# Altium PCB 客厅白色灯带控制器.PcbDoc
Units mil, origin at the board's own origin, x right, y up, seen from the top; angles counter-clockwise.
Board outline 994.28 x 2332.86 mil, 2 copper layers (Top Layer, Bottom Layer); 22 components, 14 nets, 59 pads, 33 vias.
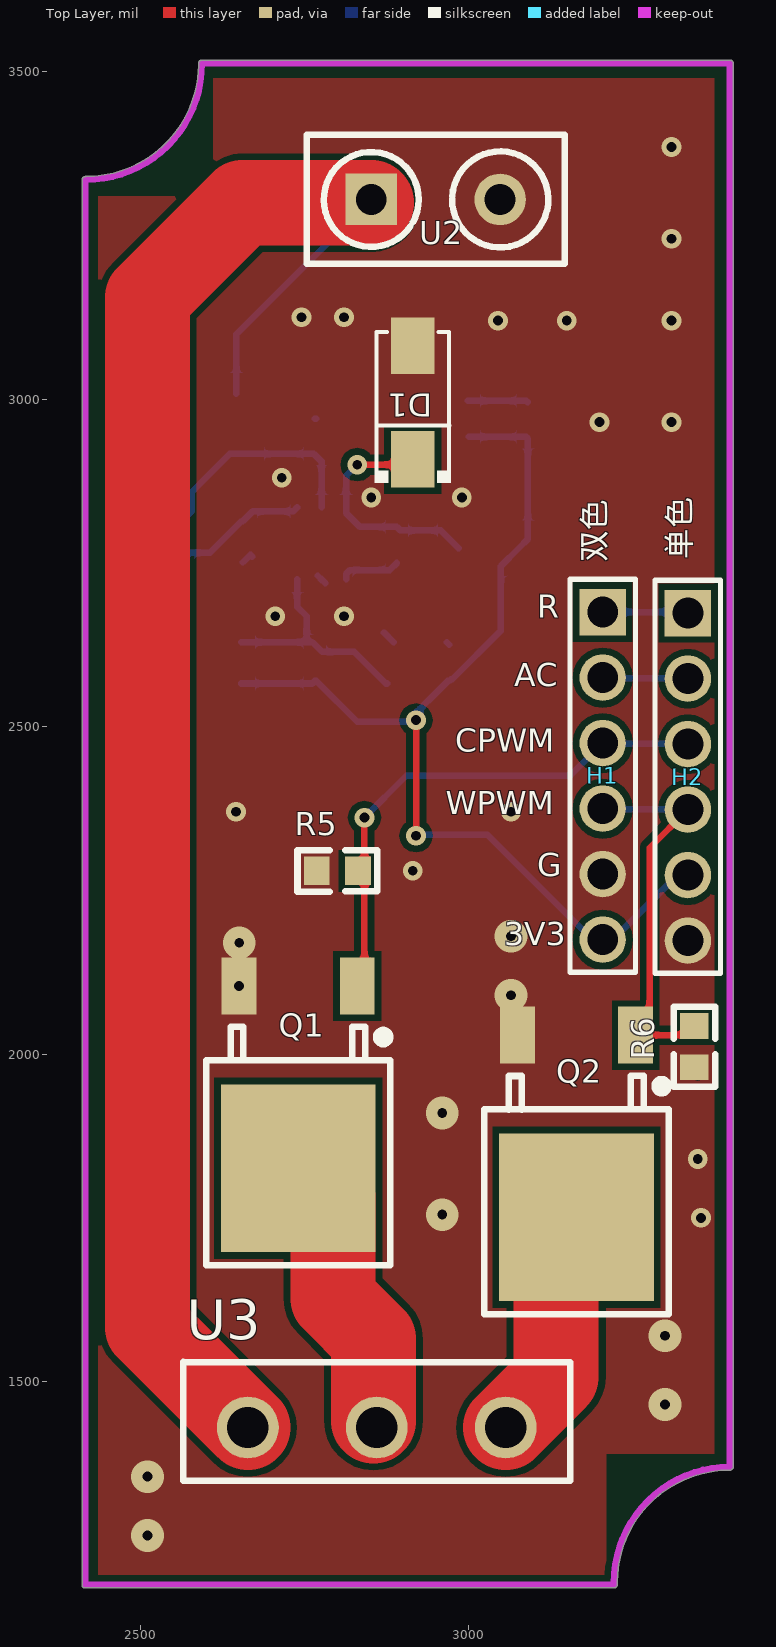
[diagram p0: Top Layer view]
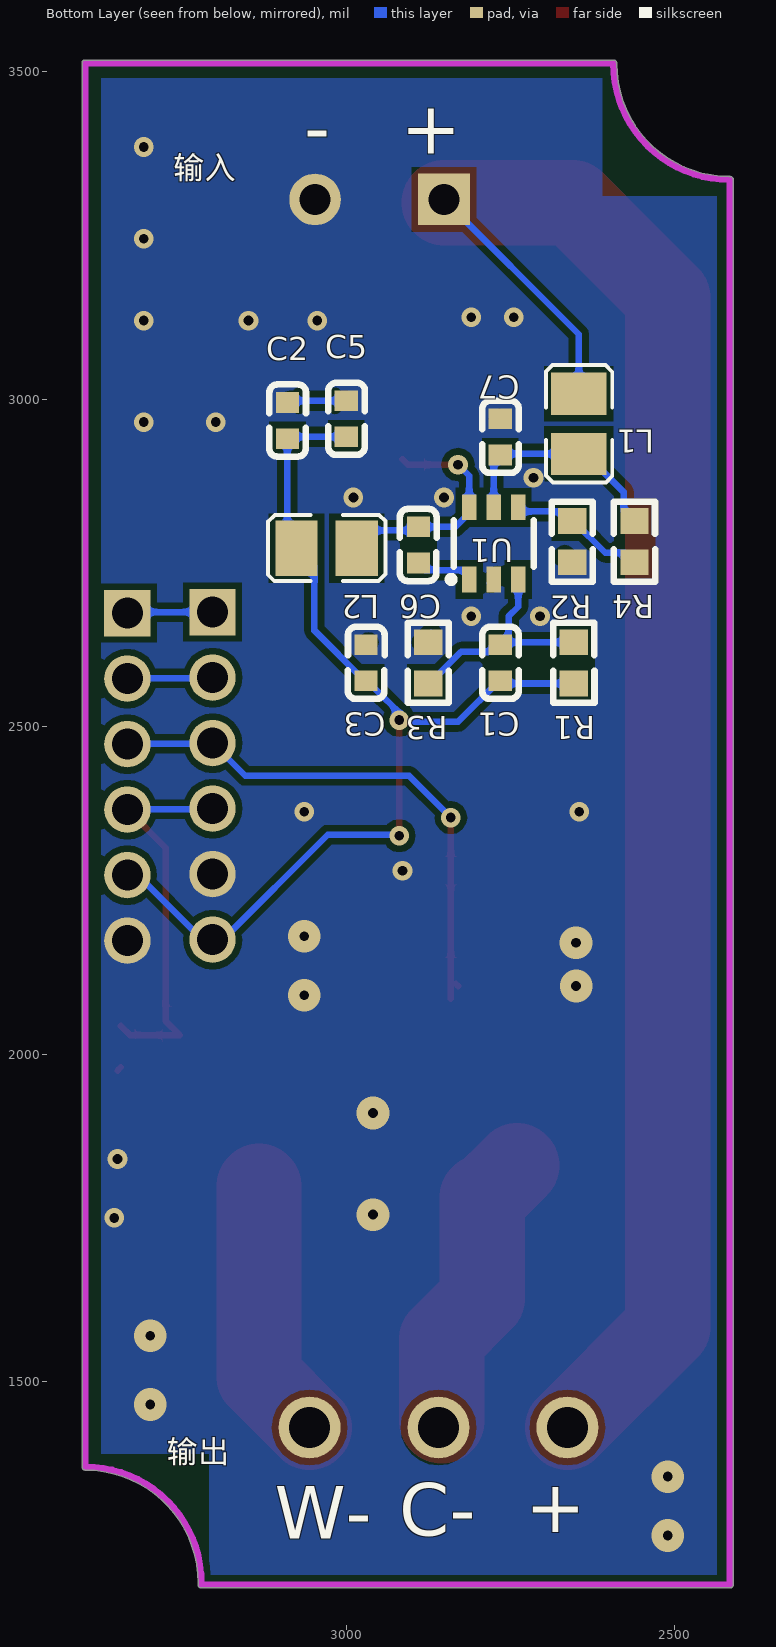
[diagram p1: Bottom Layer view, seen from below]
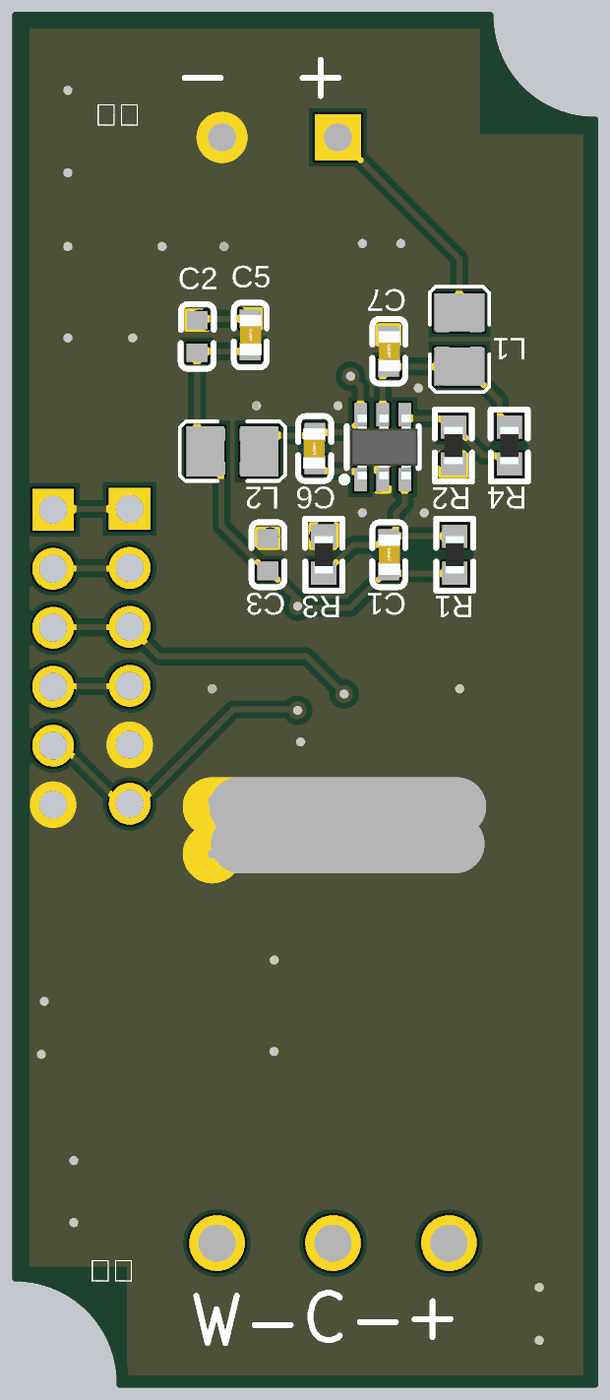
[diagram p2: 3D render of the assembled board from below, using the file's embedded part models]

## Layer stack, top to bottom
Top Solder: solder mask 0.4, Solder Resist, Dk 3.5
Top Layer: signal copper 1.4
Dielectric 1: dielectric 12.6, FR-4, Dk 4.8
Bottom Layer: signal copper 1.4
Bottom Solder: solder mask 0.4, Solder Resist, Dk 3.5

## Board outline
2409.99,1190 ccw(c2415,1190) 2415,1184.98 3222.09,1184.98 ccw(c3222.09,1190) 3227.1,1190 ccw(c3222.09,1190) 3226.9,1191.42 ccw(c3222.09,1192.83) 3227.1,1192.83 cw(c3399.25,1192.83) 3399.25,1364.98 ccw(c3399.25,1370) 3404.27,1370 3404.27,1370.03 3404.27,3512.83 ccw(c3399.25,3512.83) 3399.25,3517.85 2592.91,3517.85 ccw(c2592.91,3512.83) 2587.91,3512.5 ccw(c2592.91,3512.17) 2587.9,3512.17 cw(c2415.75,3512.17) 2415.75,3340.01 ccw(c2415.75,3335) 2415.37,3340 ccw(c2415,3335) 2409.98,3335

## Design rules (kind name [scope] priority, off if disabled: settings)
Clearance [All] p1: gap=10 ignorepadtopadclearanceinfootprint=FALSE except(0: Arc-Hole Track-Hole SMDPad-Hole THPad-Hole Via-Hole Fill-Hole Poly-Hole Region-Hole Text-Hole)
PolygonConnect [All] p1: connectstyle=Direct reliefconductorwidth=10 reliefentries=4 polygonreliefangle="90 Angle" airgapwidth=10
RoutingVias [All] p1: holewidth=28 width=50 viastyle="Through Hole" minholewidth=28 minwidth=50 maxholewidth=28 maxwidth=50
SolderMaskExpansion [All] p1: expansion=4
Width [All] p1: maxlimit=150 minlimit=10 preferedwidth=10
30 further rules are at their usual default settings.

## Components (designator, comment, footprint, x,y, rotation, side; value= is the part's Value field where it differs from the comment)
C1 "20pf" C0603 2765.72,2597.44 r270 bottom
C2 "2.2u" C0603 3090.72,2967.44 r270 bottom
C3 "10u" C0603 2970.72,2597.44 r270 bottom
C5 "47uf" C0603 3000.72,2970 r270 bottom
C6 "0.1u" C0603 2890.72,2777.44 r90 bottom
C7 "10u" C0603 2765.72,2942.44 r270 bottom
D1 "SS14_C2900678" SMA_L4.3-W2.5-LS5.0-RD-1 2915,2995 r90 top
H1 "Header-Male-2.54_1x6" HDR-TH_6P-P2.54-V-M-1 3205,2425 r270 top
H2 "Header-Male-2.54_1x6" HDR-TH_6P-P2.54-V-M-1 3335,2423.47 r270 top
L1 "4.7uH" L1008 2645.72,2962.44 r270 bottom
L2 "4.7uH" L1008 3030.72,2772.44 r180 bottom
Q1 "IRLR7843TRPBF" TO-252-2_L6.5-W6.1-P4.58-LS10.0-TR 2740,1965 r0 top
Q2 "IRLR7843TRPBF" TO-252-2_L6.5-W6.1-P4.58-LS10.0-TR 3165,1890 r0 top
R1 "75k" R0603 2653.31,2597.42 r90 bottom
R2 "20k" R0603 2655.72,2782.44 r90 bottom
R3 "24k" R0603 2875.72,2597.44 r270 bottom
R4 "100k" R0603 2560.72,2782.44 r90 bottom
R5 "1k" R0603 2800,2280 r180 top
R6 "1k" R0603 3345,2011.49 r270 top
U1 "MP2451DT-LF-P" SOT-23-6_L2.9-W1.6-P0.95-LS2.8-BR 2775.72,2779.89 r270 bottom
U2 "282880-2" CONN-TH_2P-P5.00_282880-2 2950,3305 r0 top
U3 "KF128L-5.0-3P" CONN-TH_3P-P5.00_KF128L-5.0-3P 2860,1430 r0 top

## Footprints (in the part's own frame and the unit in brackets; to place one, negate y for a bottom-side part, rotate by r counter-clockwise, add the part's x,y. Pads: shape width x height; smd on the part's side, far side on the other; paste and mask are expansions set on the pad)
C0603 [mm]
  rect 0.8x0.9 smd: 1(-0.7,0) 2(0.7,0)
  silkscreen extent -1.4,-0.7 1.4,0.72, body extent -0.88,-0.44 0.87,0.51, height 0.87
CONN-TH_2P-P5.00_282880-2 [mm]
  rect 2x2 hole 1.2: 1(-2.5,0)
  round 2 hole 1.2: 2(2.5,0)
  silkscreen extent -5,-2.5 5,2.5
CONN-TH_3P-P5.00_KF128L-5.0-3P [mm]
  round 2.4 hole 1.6: 1(-5,0) 2(0,0) 3(5,0)
  silkscreen extent -7.5,-2.07 7.5,2.54
HDR-TH_6P-P2.54-V-M-1 [mm]
  rect 1.8x1.8 hole 1.2: 1(-6.35,0)
  round 1.8 hole 1.2: 2(-3.81,0) 3(-1.27,0) 4(1.27,0) 5(3.81,0) 6(6.35,0)
  silkscreen extent -7.62,-1.27 7.62,1.27
L1008 [mm]
  rect 1.635x2.16 smd: 1(-1.168,0) 2(1.167,0)
  silkscreen extent -2.27,-1.27 2.27,1.3
R0603 [mm]
  rect 1x1.1 smd: 1(-0.8,0) 2(0.8,0)
  silkscreen extent -1.55,-0.8 1.55,0.81, body extent -0.8,-0.4 0.8,0.4, height 0.55
SMA_L4.3-W2.5-LS5.0-RD-1 [mm]
  rect 2.185x1.7 smd: 1(-2.2,0) 2(2.2,0)
  silkscreen extent -3.11,-1.48 2.73,1.48, body extent -2.6,-1.36 2.6,1.36, height 2.7
SOT-23-6_L2.9-W1.6-P0.95-LS2.8-BR [mm]
  rect 1x0.55 smd: 1(1.4,-0.95) 2(1.4,0) 3(1.4,0.95) 4(-1.4,0.95) 5(-1.4,0) 6(-1.4,-0.95)
  silkscreen extent -0.9,-1.78 1.52,1.55, body extent -1.4,-1.39 1.4,1.51, height 1.45
TO-252-2_L6.5-W6.1-P4.58-LS10.0-TR [mm]
  rect 1.35x2.2 smd: 1(2.29,3.533) 3(-2.29,3.533)
  rect 6x6.5 smd: 4(0,-3.533)
  silkscreen extent -3.57,-7.3 3.57,1.95, body extent -3.27,-6.16 3.27,3.75, height 2.51

## Part data
C1 C5 C7: library part 0.1u, Contributor=LCEDA_Lib, nameAlias=Value(F), spicePre=C, spiceSymbolName=C_0603_EU
D1: BOM_Manufacturer="BLUE ROCKET(蓝箭)", BOM_Manufacturer Part=SS14, BOM_Supplier=LCSC, BOM_Supplier Part=C2900678, Contributor=LCSC, spicePre=D, spiceSymbolName=SS14_C2900678
H1 H2: BOM_JLCPCB Part Class="Extended Part", BOM_Manufacturer=BOOMELE, BOM_Manufacturer Part=Header-Male-2.54_1x6, BOM_Supplier=LCSC, BOM_Supplier Part=C37208, spicePre=H, spiceSymbolName=Header-Male-2.54_1x6
L1 L2: BOM_JLCPCB Part Class="Extended Part", BOM_Manufacturer=SXN, BOM_Manufacturer Part=SMMS0630-4R7M, BOM_Supplier=LCSC, BOM_Supplier Part=C128688, nameAlias=Inductance, spicePre=L, spiceSymbolName=SMMS0630-4R7M
Q1 Q2: BOM_JLCPCB Part Class="Extended Part", BOM_Manufacturer=IR, BOM_Manufacturer Part=IRLR7843TRPBF, BOM_Supplier=LCSC, BOM_Supplier Part=C21988, spicePre=Q, spiceSymbolName=IRLR7843TRPBF
R1 R2 R3 R4: library part 10k, BOM_Manufacturer="Vishay Intertech", BOM_Manufacturer Part=CRCW060310K0JNEA, BOM_Supplier=LCSC, BOM_Supplier Part=C169103, nameAlias=Value(Ω), spicePre=R, spiceSymbolName=Resistor
R5 R6: library part NC, Contributor=LCEDA_Lib, nameAlias=Value(Ω), spicePre=R, spiceSymbolName=R_0603_EU
U1: "No Description Available", Mfr_Name="Monolithic Power Systems", Copyright="Copyright (C) 2022 Ultra Librarian. All rights reserved.", Manufacturer_Part_Number=MP2451DT-LF-P, RefDes=RefDes, Type=DEV
U2: BOM_JLCPCB Part Class="Extended Part", BOM_Manufacturer="TE Connectivity", BOM_Manufacturer Part=282880-2, BOM_Supplier=LCSC, BOM_Supplier Part=C306188, Contributor=LCSC, spicePre=U, spiceSymbolName=282880-2
U3: BOM_JLCPCB Part Class="Extended Part", BOM_Manufacturer="Cixi Kefa Elec", BOM_Manufacturer Part=KF128L-5.0-3P, BOM_Supplier=LCSC, BOM_Supplier Part=C474939, Contributor=LCSC, spicePre=U, spiceSymbolName=KF128L-5.0-3P
C2 C3 C6: Contributor=LCEDA_Lib, nameAlias=Value(F), spicePre=C, spiceSymbolName=C_0603_EU

## Via types
v1: diameter 30, hole 15, Top Layer to Bottom Layer, tented both sides, 23 vias
v2: diameter 50, hole 15, Top Layer to Bottom Layer, tented both sides, 10 vias

## Nets (pads, with @x,y where several pads share a name; then routed paths per layer and width w, separated by ;. In a path a pad name is that pad's centre, name@x,y a point inside that pad or via, vN(x,y) a via of type N, cw(c..) or ccw(c..) an arc to the next point about the centre after c; other vN are vias at no path point)
+3V3: C1.2 C2.2 C3.2 C5.2 H1.6 H2.5 L2.1 R1.1 | length 1581.3
  Top Layer w10: v1(2920,2333.47) v1(2920,2510)
  Bottom Layer w10: R1.1 2761.75,2565.93 C1.2 2767.68,2569.89 2830.13,2507.44 2906.3,2507.44 2968.75,2569.89 C3.2 2973.27,2572.44 2975.24,2572.44 3049.5,2646.7 3049.5,2745.26 L2.1 3090.72,2786.47 C2.2 3088.16,2942.44 C5.2 ; v1@2920,2335 3029.01,2335 3189.01,2175 H1.6 3220.77,2175 3319.23,2273.47 H2.5
AC: H1.2 H2.2 | length 130.6
  Bottom Layer w10: H1.2 3205.77,2574.23 3334.23,2574.23 H2.2
COutput: Q1.4 U3.2 | length 442.6
  Top Layer w130: Q1.4@2740,1830 Q1.4@2793.11,1776.89 ; Q1.4@2793.11,1781.89 2793.11,1626.89 2855,1565 U3.2@2855,1440
CPWM: H1.3 H2.3 Q1.1 R5.1 | length 817.5
  Top Layer w10: Q1.1 Q1.1@2833.51,2107.44 ; Q1.1@2841.18,2085 v1(2841.18,2361.18)
  Bottom Layer w10: v1(2841.18,2361.18) 2905,2425 3155,2425 H1.3 3205.77,2474.23 3329.23,2474.23 H2.3@3330,2473.47
GND: C2.1 C3.1 C5.1 C7.1 D1.2 H1.5 H2.6 Q1.3 Q2.3 R2.1 R3.1 R5.2 R6.2 U1.2 U2.2 | length 169.5
  Top Layer w10: R6.2 R6.2@3350,1975
  Bottom Layer w10: v2(2649.84,2104.1) v2@2652.79,2107.05 ; R2.1 2667.21,2762.44 R2.1@2670.2,2759.45 ; C7.1 C7.1@2767.68,2970 ; U1.2@2769.88,2730.59 U1.2 U1.2@2781.54,2718.94 ; R3.1@2871.03,2643.62 R3.1@2885.72,2628.94 ; C3.1@2966.78,2628.94 C3.1 ; C5.1@2998.75,2997.56 C5.1 3088.16,2997.56 C2.1
  other v1: 3355,1750 3350,1840 2915,2280 2645,2370 3065,2370 2705,2668.49 2810,2668.49 2851.57,2850 2990,2850 2715,2880 3200,2965 3310,2965 3045,3120 3150,3120 3310,3120 2745,3125 2810,3125 3310,3245 3310,3385
  other v2: 2510,1265 2510,1355 3300,1465 3300,1570 2960,1755 2960,1910 3065,2090 2650,2170 3065,2180
NetC1_1: C1.1 R1.2 R3.2 U1.3 | length 353.3
  Bottom Layer w10: R1.2 C1.1@2759.83,2628.91 ; U1.3 2738.31,2683.17 2753,2668.49 2753,2635.75 C1.1@2759.83,2628.91 ; R3.2 2873.75,2565.95 2825.44,2614.25 2776.46,2614.25 C1.1 2761.8,2628.91 C1.1@2759.83,2628.91
NetC6_1: C6.1 U1.1 | length 93
  Bottom Layer w10: U1.1 2813.11,2733.31 2818.93,2739.14 2879.97,2739.14 C6.1
NetC6_2: C6.2 D1.1 L2.2 U1.6 | length 363.1
  Top Layer w10: v1(2830.13,2900) 2906.61,2900 D1.1
  Bottom Layer w10: v1(2830.13,2900) 2813.11,2882.98 U1.6 2813.11,2826.15 2834.26,2805 C6.2 2896.09,2799.63 2957.57,2799.63 L2.2
NetC7_2: C7.2 L1.2 R4.2 U1.5 | length 349.6
  Bottom Layer w10: R4.2 2562.68,2813.94 2577.37,2828.62 2577.37,2858.47 2635.38,2916.48 L1.2 2764.11,2916.48 C7.2 2775.71,2904.89 U1.5
NetR2_2: R2.2 R4.1 U1.4 | length 212.7
  Bottom Layer w10: R4.1 2575.4,2765.64 2605.44,2765.64 2653.75,2813.94 R2.2 2670.4,2828.62 2732.48,2828.62 2738.31,2834.45 U1.4
R: H1.1 H2.1 | length 130.6
  Bottom Layer w10: H1.1 3333.47,2675 H2.1
VCC: L1.1 U2.1 U3.1 | length 2600.4
  Top Layer w130: U3.1 2510,1583.15 2510,3155 2655,3300 U2.1@2851.57,3300
  Bottom Layer w10: L1.1 2645.72,3099.14 U2.1 ; U2.1@2878.29,3284.86 U2.1@2878.29,3313.29
WOutput: Q2.4 U3.3 | length 400.8
  Top Layer w130: U3.3 3133.89,1507.05 Q2.4@3133.89,1798.89
WPWM: H1.4 H2.4 Q2.1 R6.1 | length 603.7
  Top Layer w10: H2.4 3276.74,2315.21 3276.74,2050.67 Q2.1 3331.11,2029.1 R6.1
  Bottom Layer w10: H1.4 3205.77,2374.23 3334.23,2374.23 H2.4

## Polygon pours and split planes (outlines as drawn)
GND on Bottom Layer "Bottom Layer-GND" (solid, pour order 24): 3375,3490 3375,1390 3210,1390 3210,1205 2435,1205 2435,3310 2610,3310 2610,3490
GND on Top Layer "Top Layer-GND" (solid, pour order 26): 3375,3490 3375,1390 3210,1390 3210,1205 2435,1205 2435,3310 2610,3310 2610,3490

## Keep-outs
Keep-Out Layer:
  lines w10: 2415,3335 2415,1190 3222.09,1190 ; 2415.75,3335 ccw(c2415.75,3512.17) 2592.91,3512.17 ; 2592.91,3512.83 3399.25,3512.83 3399.25,1370 ccw(c3399.25,1192.83) 3222.09,1192.83

## Silkscreen, mask and mechanical layers (free items; w line width, h text height)
Top Overlay:
  text "单色" at 3350,2755 h60 r90
  text "双色" at 3220,2750.95 h60 r90
  text "R" at 3105,2655 h60
  text "AC" at 3070,2550 h60
  text "CPWM" at 2980,2450 h60
  text "WPWM" at 2965,2355 h60
  text "G" at 3105,2260 h60
  text "3V3" at 3055,2155 h60
Bottom Overlay:
  text "+" at 2825,3375 h80
  text "-" at 3025,3375 h80
  text "输入" at 3265,3325 h60
  text "输出" at 3275,1365 h60
  text "+" at 2635,1270 h80
  text "C-" at 2920,1265 h80
  text "W-" at 3110,1260 h80
Top Paste:
  lines w130: 2663.15,1430 2510,1583.15 2510,3160 2690,3340 2851.57,3340 ; 2793.11,1781.89 2793.11,1626.89 2855,1565 2855,1440 ; 3050,3335 3060,2035 ; 3056.85,1430 3133.89,1507.05 3133.89,1798.89
Bottom Paste:
  lines w100: 2650,2170 3020,2170 ; 2652.79,2107.05 3017.05,2107.05
Top Solder:
  lines w130: 2650,1430 2510,1570 2510,3160 2690,3340 2851.57,3340 ; 2793.11,1776.89 2793.11,1621.89 2855,1560 2855,1435 ; 3048.43,3340 3055,2035 ; 3056.85,1435 3133.89,1512.05 3133.89,1803.89
Bottom Solder:
  lines w100: 2650,2170 3065,2170 ; 2652.79,2107.05 3047.95,2107.05 3065,2090